# EAGLE board groupe2 (EAGLE 8.6.3)
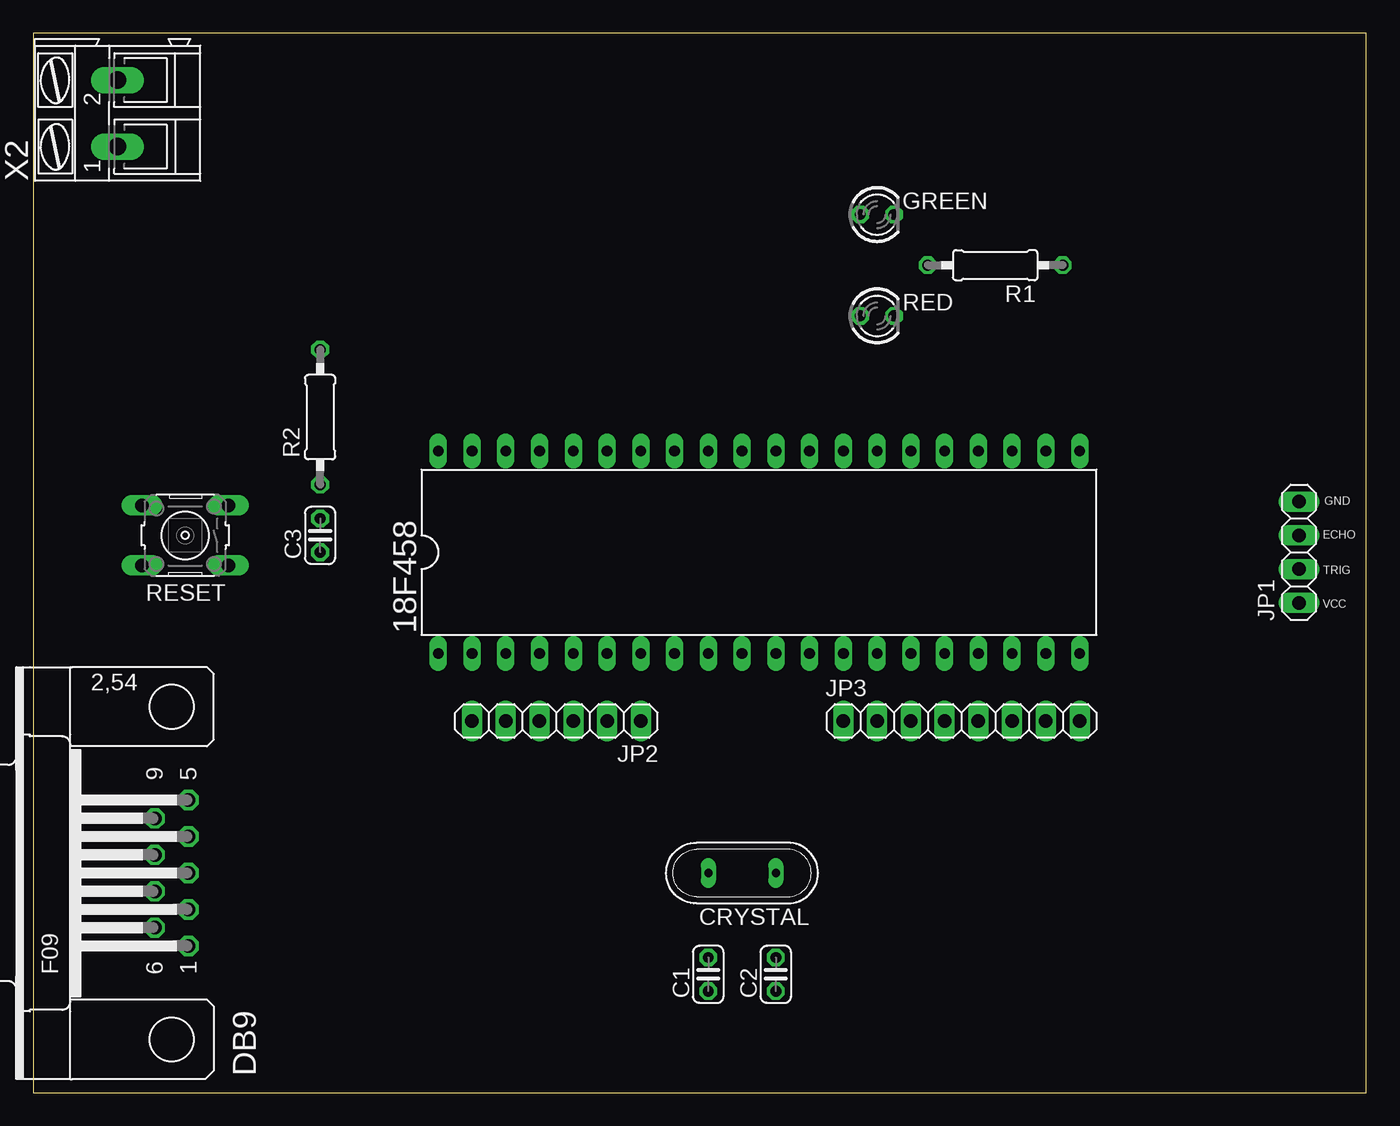
[diagram p0: board, top side]
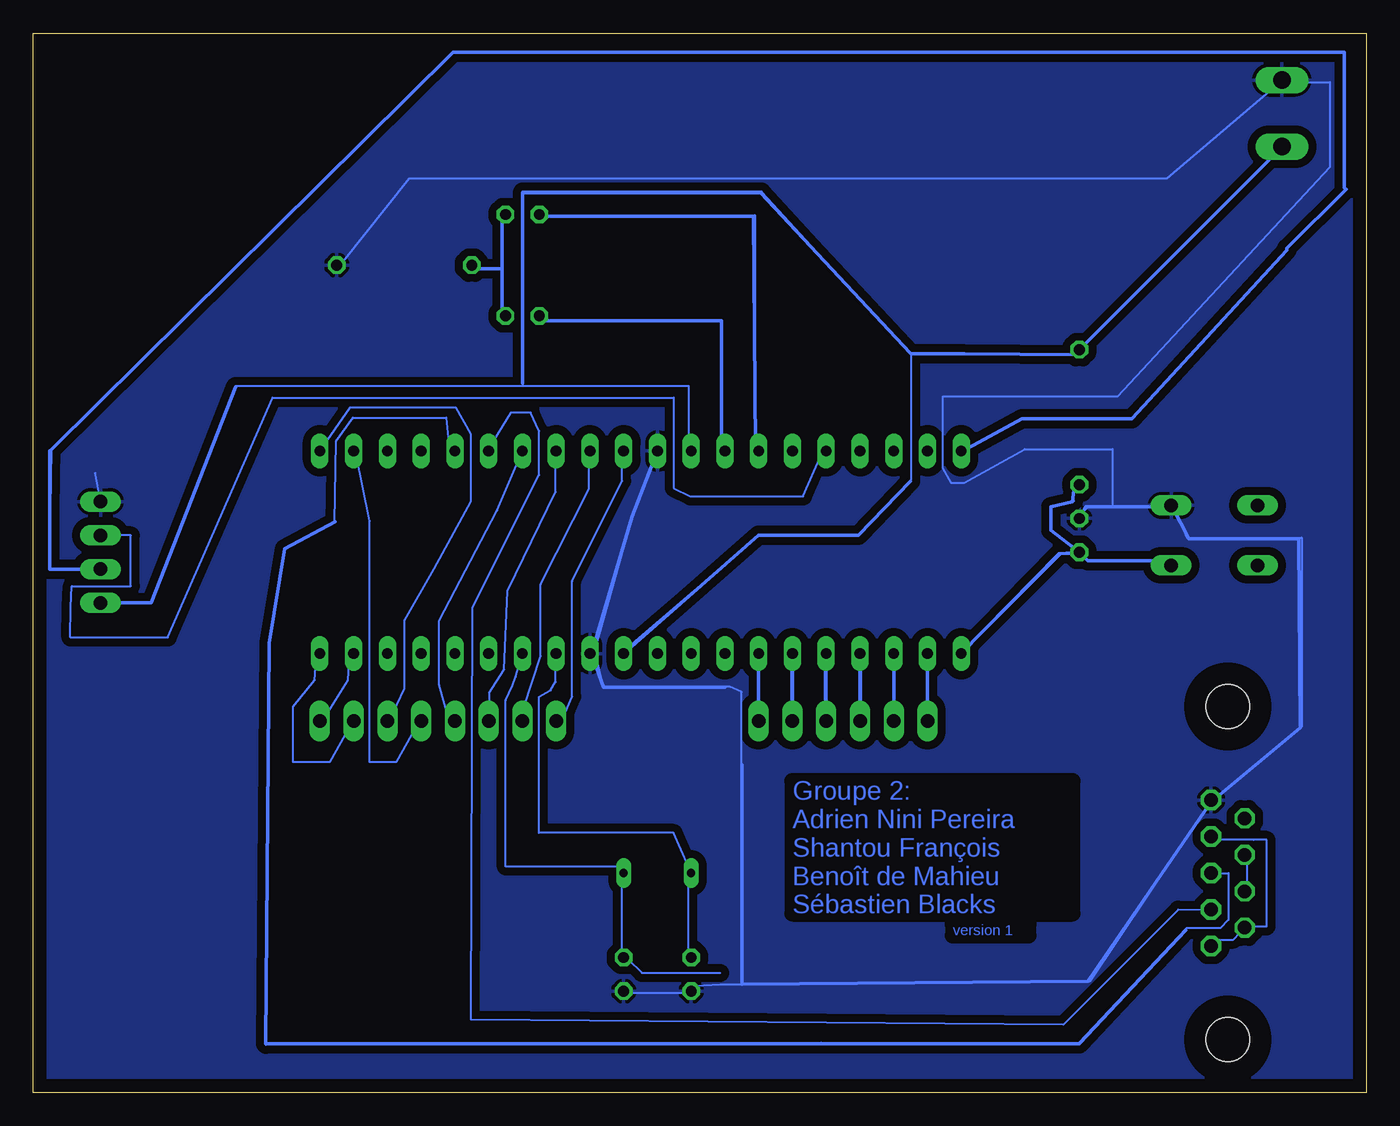
[diagram p1: board, bottom side, seen from below]

Size 100.31 x 79.68 mm. Coordinates in mm from the lower left corner, seen from the top.
Outline: 0,0 100.31,0 100.31,79.68 0,79.68 0,0
Copper layers (1*16): Top 0.035mm / dielectric 1.5mm / Bottom 0.035mm
Design rules "default": minimum track width 6mil, minimum drill 0.35mm, track to track 6mil, track to pad 6mil, pad to pad 6mil, via to via 6mil, smd to smd 6mil, copper to edge 40mil, drill to drill 6mil, minimum pad ring 10mil, minimum via ring 8mil, stop-mask expansion 4mil, vias tented up to drill 0mil, thermal gap 10mil

## Footprints (pad centres in the part's own frame; a part is rotated, then mirrored left to right if it is on the bottom)
DIL40 = drill 0.813 long: 1 -24.13,-7.62; 2 -21.59,-7.62; 3 -19.05,-7.62; 4 -16.51,-7.62; 5 -13.97,-7.62; 6 -11.43,-7.62; 7 -8.89,-7.62; 8 -6.35,-7.62; 9 -3.81,-7.62; 10 -1.27,-7.62; 11 1.27,-7.62; 12 3.81,-7.62; 13 6.35,-7.62; 14 8.89,-7.62; 15 11.43,-7.62; 16 13.97,-7.62; 17 16.51,-7.62; 18 19.05,-7.62; 19 21.59,-7.62; 20 24.13,-7.62; 21 24.13,7.62; 22 21.59,7.62; 23 19.05,7.62; 24 16.51,7.62; 25 13.97,7.62; 26 11.43,7.62; 27 8.89,7.62; 28 6.35,7.62; 29 3.81,7.62; 30 1.27,7.62; 31 -1.27,7.62; 32 -3.81,7.62; 33 -6.35,7.62; 34 -8.89,7.62; 35 -11.43,7.62; 36 -13.97,7.62; 37 -16.51,7.62; 38 -19.05,7.62; 39 -21.59,7.62; 40 -24.13,7.62
C025-024X044 = drill 0.813 octagon: 1 -1.27,0; 2 1.27,0
QS = drill 0.61 long: 1 -2.54,0; 2 2.54,0
F09H = drill 1.016 octagon: 1 -5.486,-1.27; 2 -2.743,-1.27; 3 0,-1.27; 4 2.743,-1.27; 5 5.486,-1.27; 6 -4.115,1.27; 7 -1.372,1.27; 8 1.372,1.27; 9 4.115,1.27 | hole 3.302: -12.522,0; 12.522,0
LED3MM = drill 0.813 octagon: A -1.27,0; K 1.27,0
1X04 = drill 1.016 long: 1 -3.81,0; 2 -1.27,0; 3 1.27,0; 4 3.81,0
1X06 = drill 1.016 long: 1 -6.35,0; 2 -3.81,0; 3 -1.27,0; 4 1.27,0; 5 3.81,0; 6 6.35,0
1X08 = drill 1.016 long: 1 -8.89,0; 2 -6.35,0; 3 -3.81,0; 4 -1.27,0; 5 1.27,0; 6 3.81,0; 7 6.35,0; 8 8.89,0
0207/10 = drill 0.813 octagon: 1 -5.08,0; 2 5.08,0
B3F-10XX = drill 1.016 long: 1 -3.251,2.261; 2 3.251,2.261; 3 -3.251,-2.261; 4 3.251,-2.261
AK300/2 = drill 1.321 long: 1 -2.515,0; 2 2.489,0

## Placement (x,y rotation side)
18F458  PIC16F877P  [DIL40]  54.61,40.64 0 top
C1  14pF  [C025-024X044]  50.8,8.89 90 top
C2  14pF  [C025-024X044]  55.88,8.89 90 top
C3  1µF  [C025-024X044]  21.59,41.91 90 top
CRYSTAL  [QS]  53.34,16.51 180 top
DB9  [F09H]  10.41,16.51 90 top
GREEN  [LED3MM]  63.5,66.04 0 top
JP1  [1X04]  95.25,40.64 90 top
JP2  [1X06]  39.37,27.94 180 top
JP3  [1X08]  69.85,27.94 0 top
R1  220Ω  [0207/10]  72.39,62.23 180 top
R2  10kΩ  [0207/10]  21.59,50.8 90 top
RED  [LED3MM]  63.5,58.42 0 top
RESET  [B3F-10XX]  11.43,41.91 180 top
X2  [AK300/2]  6.35,73.66 90 top

## Library data of the parts
18F458 = microchip; MF: MICROCHIP; MPN: PIC16F877-04/P; OC_FARNELL: 9761349; OC_NEWARK: 61K3463
C1-C3 = rcl; SPICEPREFIX: C
CRYSTAL = special
DB9 = con-subd; OC_FARNELL: unknown; OC_NEWARK: unknown
GREEN RED = led
JP1-JP3 = pinhead
R1 R2 = rcl; SPICEPREFIX: R
RESET = switch-omron; MPN: B3F-1000; OC_FARNELL: 176432; OC_NEWARK: 36M3542
X2 = con-ptr500; OC_FARNELL: unknown; OC_NEWARK: unknown

## Nets
ECHO: 18F458.36 JP1.3
GND: 18F458.12 18F458.31 C1.1 C2.1 C3.2 DB9.5 JP1.4 R1.1 RESET.3 X2.2
N$1: 18F458.34 GREEN.A
N$2: 18F458.33 RED.A
N$3: 18F458.1 C3.1 R2.1 RESET.1
N$4: 18F458.2 JP2.6
N$5: 18F458.3 JP2.5
N$6: 18F458.4 JP2.4
N$7: DB9.1 DB9.4 DB9.6
N$8: 18F458.26 DB9.2
N$9: DB9.7 DB9.8
N$10: 18F458.5 JP2.3
N$11: 18F458.25 DB9.3
N$14: 18F458.6 JP2.2
N$15: 18F458.7 JP2.1
N$16: 18F458.13 C1.2 CRYSTAL.2
N$17: 18F458.14 C2.2 CRYSTAL.1
N$18: GREEN.K R1.2 RED.K
RD0: 18F458.19 JP3.8
RD1: 18F458.20 JP3.7
RD2: 18F458.21 JP3.6
RD3: 18F458.22 JP3.5
RD4: 18F458.27 JP3.4
RD5: 18F458.28 JP3.3
RD6: 18F458.29 JP3.2
RD7: 18F458.30 JP3.1
TRIG: 18F458.40 JP1.2
VCC: 18F458.11 18F458.32 JP1.1 R2.2 X2.1

## Tracks (layer width: path | path; a pad name or v marks a point on that pad's centre or on a via)
ECHO
  Bottom 0.152: 18F458.36 41,48 42.37,44.85 50.87,44.85 52.13,45.47 52.13,52.27 82.31,52.27 90.19,34.23 97.52,34.23 97.5,36.5 97.41,38.1 92.96,38.1 92.96,41.91 JP1.3
GND
  Bottom 0.152: 18F458.31 53.5,48 55.33,42.99 58,33.5 18F458.12 58,33 57.41,30.51 47.87,30.51 47,30.14 47,8.11 | C2.1 55.5,7.5 51,7.5 C1.1 50.5,8 48.61,8.11 47,8.11 | 19.1,44 15,44 RESET.3 14.5,44 13.5,41.73 4.86,41.73 4.86,27.5 11.5,22 DB9.5 12,21.5 20.82,8.37 47,8.11 | 19.1,44 21,44 21.5,43.5 C3.2 | R1.1 77,62.5 72,68.77 15,68.77 6.5,76 X2.2 6,76 2.73,76 2.73,69.61 18.73,52.34 31.88,52.34 31.88,47 31.25,45.87 30.25,45.87 25.69,48.4 19.1,48.4 19.1,44 | JP1.4 95.63,46.61
  Bottom 0.254: C3.2 21.08,44.07 14.61,44.07 13.34,41.66 5.08,41.66 4.95,27.43 11.68,21.84 20.95,8.38 46.99,8.13 46.99,24.64 | 48.26,30.48 57.4,30.48 58.29,33.02 55.24,43.31 18F458.31
  pour Bottom (isolate 0.61): 1.27,78.74 99.82,78.61 99.69,0.38 0.38,0.64 0.64,78.87
N$1
  Bottom 0.152: 18F458.34 46,48.5 46,66 62,66 GREEN.A
  Bottom 0.254: GREEN.A 61.98,65.91 46.1,65.91 45.97,48.51 45.59,48.13
N$2
  Bottom 0.152: 18F458.33 48.5,48.5 48.5,58 62,58 RED.A
  Bottom 0.254: 18F458.33 48.39,48.64 48.51,48.9 48.51,58.04 61.98,58.04 RED.A
N$3
  Bottom 0.152: C3.1 21.5,40.5 21,40 15,40 RESET.1 | 18F458.1 23,40.5 22,40.5 C3.1 | R2.1 22,45.5 22,44.5 23.77,44 23.77,42.27 22,41 C3.1
  Bottom 0.254: 14.61,39.62 14.99,40.01 20.95,40.01 C3.1 | C3.1 23.75,42.29 23.75,44.07 22.1,44.45 21.97,45.59 R2.1 | C3.1 23.11,40.51 30.61,32.89
N$4
  Bottom 0.152: 18F458.2 33,33 33,28 JP2.6
  Bottom 0.254: JP2.6 18F458.2
N$5
  Bottom 0.152: 18F458.3 35.5,33 35.5,28 JP2.5
  Bottom 0.254: JP2.5 18F458.3
N$6
  Bottom 0.152: 18F458.4 38,33 38,28 JP2.4
  Bottom 0.254: JP2.4 18F458.4
N$7
  Bottom 0.152: DB9.1 11.5,11.5 10,11.5 9.5,12 DB9.6 9,12.5 7.49,12.5 7.49,19.01 8.5,19 11.5,19 DB9.4
N$8
  Bottom 0.152: 18F458.26 66,48.5 64.37,51.14 62.87,51.14 62.25,49.75 62.25,46.46 67.25,36.51 67.37,5.48 22.81,5.1 14.16,13.75 DB9.2
N$9
  Bottom 0.152: DB9.7 9,15.5 9,17.5 DB9.8
N$10
  Bottom 0.152: 40.5,33 18F458.5 40.75,33 40.75,28 JP2.3
  Bottom 0.254: JP2.3 18F458.5
N$11
  Bottom 0.152: 41,3.67 21.68,3.71 13.52,12.37 10.99,12.37 10.37,12.99 10.37,16.5 11.5,16.5 DB9.3 | 41,3.67 82.79,3.59 82.53,33.88 81.41,40.84 77.63,42.87 77.5,49 76.25,50.76 69.23,50.76 69,48.5 18F458.25 | 41,3.68 41,3.75 41,3.67
  Bottom 0.254: 13.59,12.19 21.59,3.68 41,3.68 82.8,3.68 82.55,33.78 81.41,40.89 77.6,42.93
N$14
  Bottom 0.152: 43.5,33 18F458.6 43.25,33 43.25,28 JP2.2
  Bottom 0.254: JP2.2 18F458.6
N$15
  Bottom 0.152: 46,33 18F458.7 45.75,33 45.75,28 JP2.1
  Bottom 0.254: JP2.1 18F458.7
N$16
  Bottom 0.152: C1.2 51,10.5 51,16.5 CRYSTAL.2 51,17 52.13,19.52 62.25,19.52 62.25,29.75 61.37,30.25 61,30.89 61,33 18F458.13
N$17
  Bottom 0.152: 18F458.14 64.01,31.27 64.25,30.64 64.75,29.5 64.75,17 56,17 CRYSTAL.1 56,16.5 56,10.5 C2.2 55.5,10 54.5,9 50.5,9 50.13,8.99 48.63,8.99
N$18
  Bottom 0.152: 65,62 65,58.5 RED.K | 65,62 67,62 R1.2 | 65,62 65,66 GREEN.K
  Bottom 0.254: 67.18,62.23 66.93,61.98 65.02,61.98 | GREEN.K 65.02,65.79 65.02,61.98 | 65.02,61.98 65.02,58.42 RED.K
RD0
  Bottom 0.152: 18F458.19 76.5,33 76.63,31.02 78.5,28 JP3.8
RD1
  Bottom 0.152: 18F458.20 79,33 79.13,31.02 80.76,29 80.76,24.86 78,24.86 76.5,27.5 JP3.7
RD2
  Bottom 0.152: 18F458.21 76.5,51.52 68.5,51.52 67.37,49.5 67.37,44.48 70.15,39.4 72.37,35.52 72.37,30.41 73.5,28 JP3.6
RD3
  Bottom 0.152: 18F458.22 76,48 74.98,43 75,34 75,24.86 73,24.86 71.5,27.5 JP3.5
RD4
  Bottom 0.152: 18F458.27 65.41,43.79 69.75,35.5 69.75,30.67 69,28 JP3.4
RD5
  Bottom 0.152: 18F458.28 61,48 61,45.17 64.62,37.75 64.87,31.81 66,30.03 JP3.3
RD6
  Bottom 0.152: 18F458.29 58.5,48 58.5,45.4 62.12,38.22 62.12,32.83 63.37,29.02 JP3.2
RD7
  Bottom 0.152: 18F458.30 56,48 56,46 59.75,38.44 59.75,29.78 60.5,28 JP3.1
TRIG
  Bottom 0.152: 99.06,39.37 98.93,48.39 | 18F458.40 30.25,48.5 30,48.5 29.98,48.45
  Bottom 0.254: 98.93,48.39 68.71,78.23 1.65,78.23 1.65,68.07 1.52,67.94 5.97,63.5 5.97,63.37 17.65,50.67 25.91,50.67 29.98,48.45 30.1,48.39 | JP1.2 99.06,39.37 99.06,48.26
VCC
  Bottom 0.152: 63.5,53.15 85.09,53.15 91.44,36.83 | 63.5,53.15 51,53.15 51,48.5 18F458.32 | 34.25,55.5 34.25,46.1 38.17,41.94 45.67,41.94 55.5,33.5 18F458.11 | 34.25,55.5 22,55.5 R2.2 21.5,56 6.5,71 X2.1 | 63.5,67.69 63.5,67.76 45.5,67.76 34.25,55.5 | 63.5,53.34 63.5,53.15
  Bottom 0.254: 63.5,53.34 63.5,67.69 45.59,67.69 34.29,55.63 21.97,55.5 6.35,71.12 | 18F458.11 45.72,41.91 38.23,41.91 34.29,45.97 | JP1.1 91.44,36.83 85.09,53.09

## Text on the board
Bottom: Groupe 2: / Adrien Nini Pereira / Shantou François / Benoît de Mahieu / Sébastien Blacks | version 1
tNames: GND | ECHO | TRIG | VCC